# EAGLE board VoiceRecognition_Team3 (EAGLE 9.2.0)
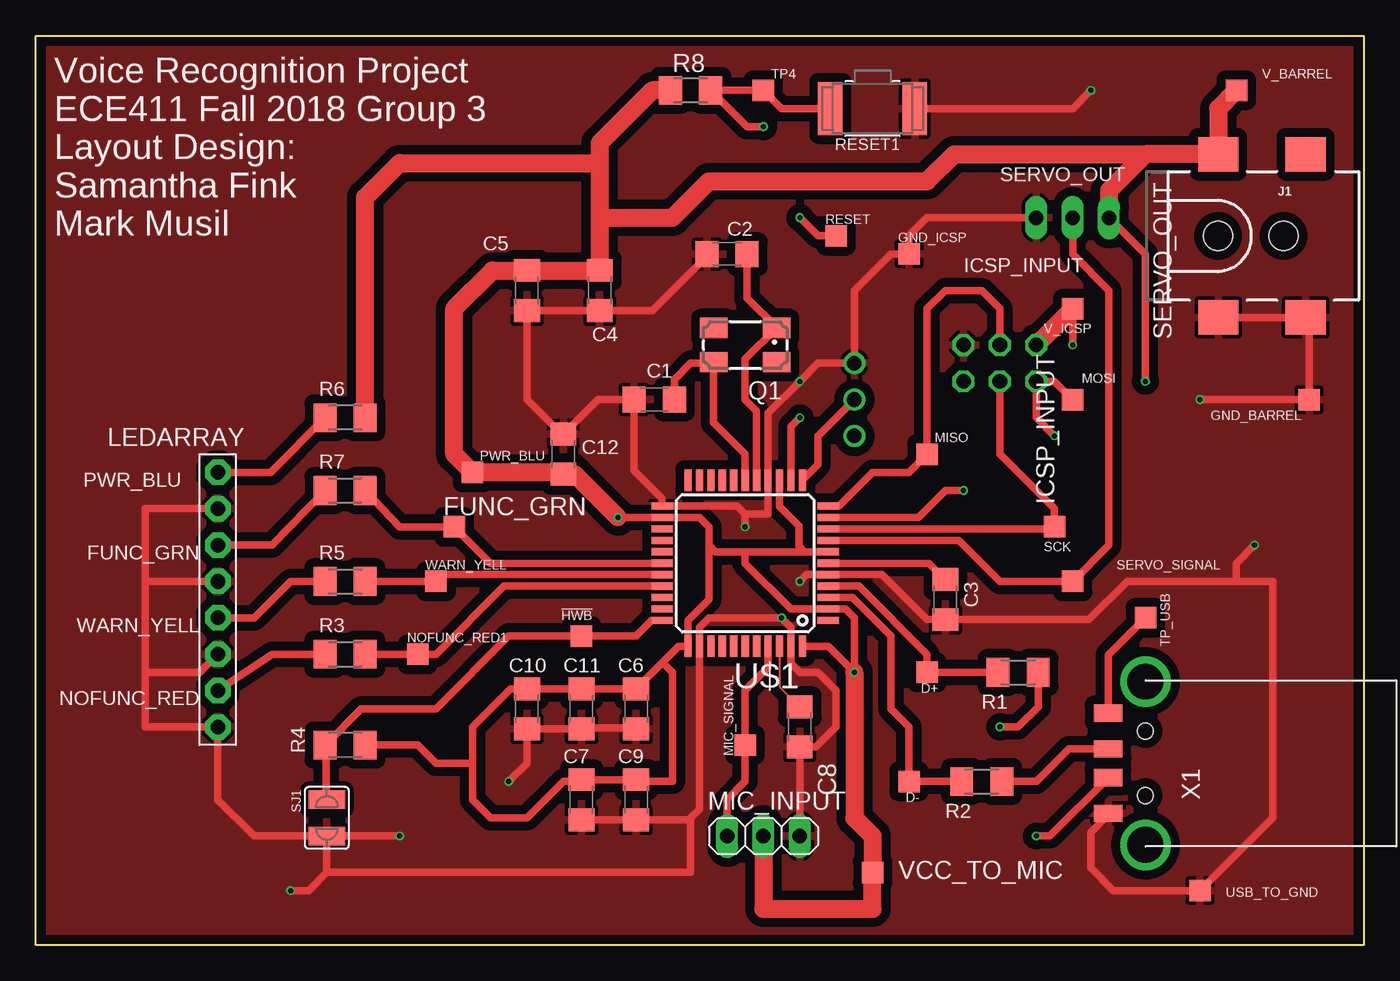
[diagram p0: board, top side]
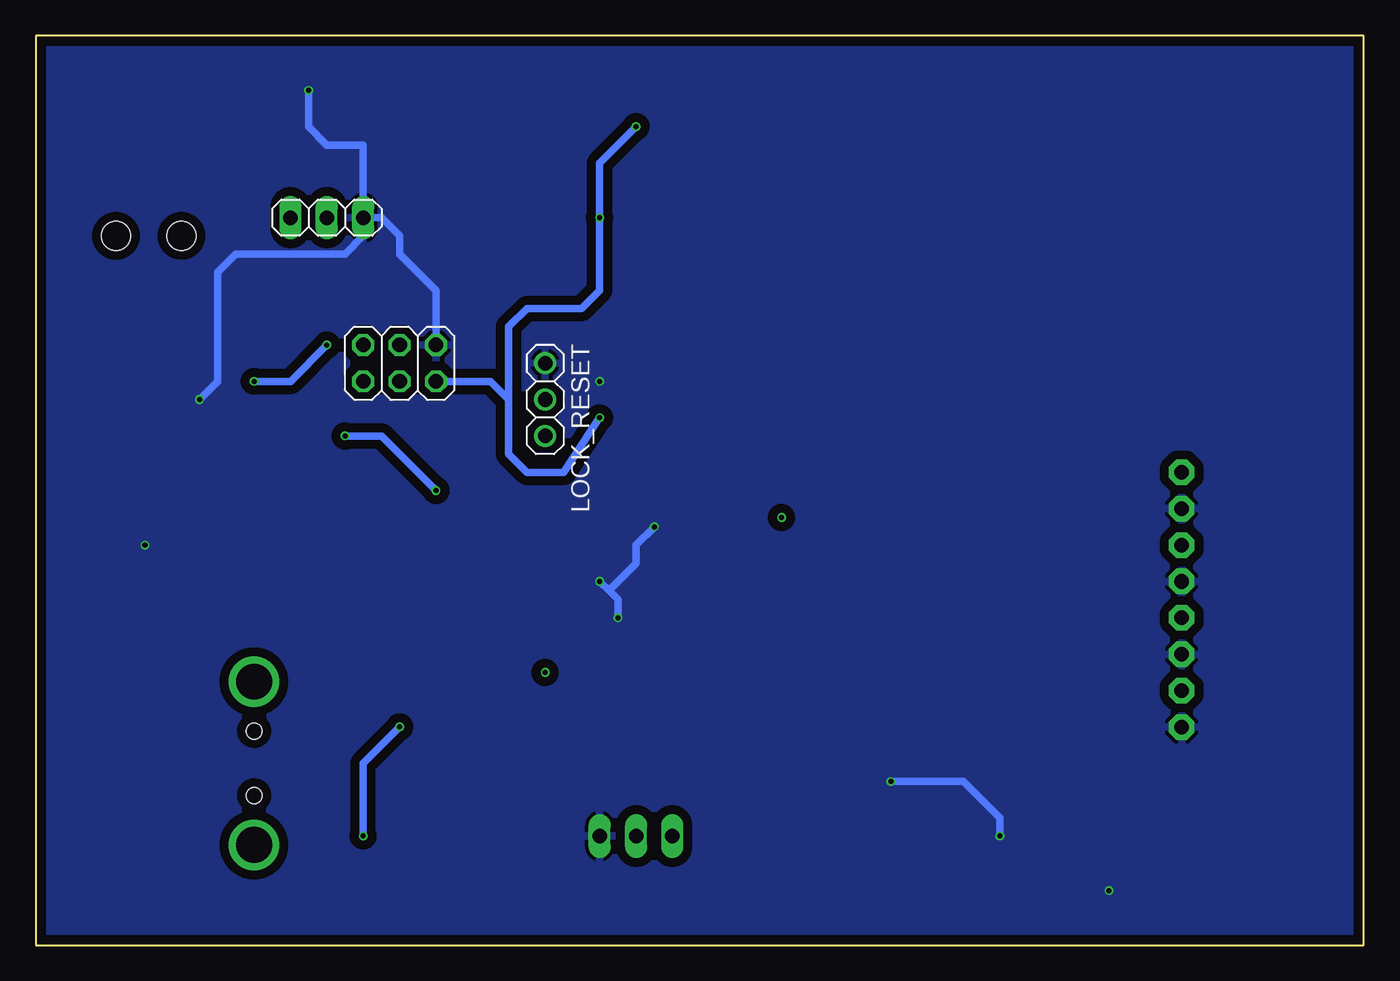
[diagram p1: board, bottom side, seen from below]

Size 92.71 x 63.5 mm. Coordinates in mm from the lower left corner, seen from the top.
Outline: 0,0 0,63.5 92.71,63.5 92.71,0 0,0
Copper layers (1*16): Top 0.035559375mm / dielectric 1.6mm / Bottom 0.035559375mm
Design rules "oshpark-2layer": minimum track width 6mil, minimum drill 10mil, track to track 6mil, track to pad 6mil, pad to pad 6mil, via to via 6mil, smd to smd 6mil, copper to edge 15mil, drill to drill 6mil, minimum pad ring 5mil, minimum via ring 5mil, stop-mask expansion 2.5mil, vias tented up to drill 0mil, thermal gap 10mil
Net classes: 0 VCC: width 0.05 mm; 1 GND: width 0.001 mm

## Footprints (pad centres in the part's own frame; a part is rotated, then mirrored left to right if it is on the bottom)
TP15SQ = smd 1.5 x 1.5: TP 0,0
C1206 = smd 1.6 x 1.8: 1 -1.4,0; 2 1.4,0
2X03 = drill 1.016 octagon: 1 -2.54,-1.27; 2 -2.54,1.27; 3 0,-1.27; 4 0,1.27; 5 2.54,-1.27; 6 2.54,1.27
POWER_JACK_SMD = smd 2.8 x 2.4: GND 0,-5.7; P$4 6.1,-5.7; VIN0 0,5.7; VIN1 6.1,5.7 | hole 2.032: 0,0; 4.572,0
1X08-BIG = drill 1.016 pad 1.778 octagon: 1 -8.89,0; 2 -6.35,0; 3 -3.81,0; 4 -1.27,0; 5 1.27,0; 6 3.81,0; 7 6.35,0; 8 8.89,0
1X03 = drill 1.016: 1 -2.54,0; 2 0,0; 3 2.54,0
1X03' = drill 1.016 long: 1 -2.54,0; 2 0,0; 3 2.54,0
CTS406 = smd 1.9 x 1.4: 1 -2.2,-1.2; 2 2.2,-1.2; 3 2.2,1.2; 4 -2.2,1.2
M1206 = smd 1.6 x 2: 1 -1.4,0; 2 1.4,0
BTN_CK_KSS = smd 1.7 x 3.7: P$1 -2.95,0; P$2 2.95,0
SJW = smd 1.27 x 2.54: 1 -1.27,0; 2 1.27,0
TQFP44 = smd 1.5 x 0.5: 1 -5.8,4; 2 -5.8,3.2; 3 -5.8,2.4; 4 -5.8,1.6; 5 -5.8,0.8; 6 -5.8,0; 7 -5.8,-0.8; 8 -5.8,-1.6; 9 -5.8,-2.4; 10 -5.8,-3.2; 11 -5.8,-4; 23 5.8,-4; 24 5.8,-3.2; 25 5.8,-2.4; 26 5.8,-1.6; 27 5.8,-0.8; 28 5.8,0; 29 5.8,0.8; 30 5.8,1.6; 31 5.8,2.4; 32 5.8,3.2; 33 5.8,4 | smd 0.5 x 1.5: 12 -4,-5.8; 13 -3.2,-5.8; 14 -2.4,-5.8; 15 -1.6,-5.8; 16 -0.8,-5.8; 17 0,-5.8; 18 0.8,-5.8; 19 1.6,-5.8; 20 2.4,-5.8; 21 3.2,-5.8; 22 4,-5.8; 34 4,5.8; 35 3.2,5.8; 36 2.4,5.8; 37 1.6,5.8; 38 0.8,5.8; 39 0,5.8; 40 -0.8,5.8; 41 -1.6,5.8; 42 -2.4,5.8; 43 -3.2,5.8; 44 -4,5.8
MOLEX_480371000 = smd 1.2 x 2: 1 3.5,2.6; 2 1,2.6; 3 -1,2.6; 4 -3.5,2.6 | drill 2.5: M1 -5.7,0; M2 5.7,0 | hole 1.1: -2.25,0; 2.25,0

## Placement (x,y rotation side)
!HWB  TPTP15SQ  [TP15SQ]  38.1,21.59 0 top
C1  18pF  [C1206]  43.18,38.1 0 top
C2  18pF  [C1206]  48.26,48.26 0 top
C3  1uF  [C1206]  63.5,24.13 270 top
C4  100nF  [C1206]  39.37,45.72 270 top
C5  10uF  [C1206]  34.29,45.72 270 top
C6  100nF  [C1206]  41.91,16.51 270 top
C7  100nF  [C1206]  38.1,10.16 270 top
C8  100nF  [C1206]  53.34,15.24 270 top
C9  100nF  [C1206]  41.91,10.16 270 top
C10  100nF  [C1206]  34.29,16.51 270 top
C11  100nF  [C1206]  38.1,16.51 270 top
C12  100nF  [C1206]  36.83,34.29 90 top
D+  TPTP15SQ  [TP15SQ]  62.23,19.05 0 top
D-  TPTP15SQ  [TP15SQ]  60.96,11.43 0 top
FUNC_GRN  TPTP15SQ  [TP15SQ]  29.21,29.21 0 top
GND_BARREL  TPTP15SQ  [TP15SQ]  88.9,38.1 180 top
GND_ICSP  TPTP15SQ  [TP15SQ]  60.96,48.26 0 top
ICSP_INPUT  [2X03]  67.31,40.64 0 bottom
J1  5.5x2.1mm Barrel  [POWER_JACK_SMD]  82.55,49.53 0 top
LEDARRAY  [1X08-BIG]  12.7,24.13 270 top
LOCK_RESET  [1X03]  57.15,38.1 270 bottom
MIC_INPUT  [1X03']  50.8,7.62 0 top
MIC_SIGNAL  TPTP15SQ  [TP15SQ]  49.53,13.97 0 top
MISO  TPTP15SQ  [TP15SQ]  62.23,34.29 0 top
MOSI  TPTP15SQ  [TP15SQ]  72.39,38.1 0 top
NOFUNC_RED1  TPTP15SQ  [TP15SQ]  26.67,20.32 0 top
PWR_BLU  TPTP15SQ  [TP15SQ]  30.48,33.02 180 top
Q1  16MHz  [CTS406]  49.53,41.91 180 top
R1  22  [M1206]  68.58,19.05 180 top
R2  22  [M1206]  66.04,11.43 180 top
R3  1k  [M1206]  21.59,20.32 180 top
R4  10k  [M1206]  21.59,13.97 0 top
R5  1k  [M1206]  21.59,25.4 180 top
R6  1k  [M1206]  21.59,36.83 0 top
R7  1k  [M1206]  21.59,31.75 180 top
R8  10k  [M1206]  45.72,59.69 180 top
RESET  TPTP15SQ  [TP15SQ]  55.88,49.53 0 top
RESET1  [BTN_CK_KSS]  58.42,58.42 180 top
SCK  TPTP15SQ  [TP15SQ]  71.12,29.21 0 top
SERVO_OUT  [1X03']  72.39,50.8 0 bottom
SERVO_SIGNAL  TPTP15SQ  [TP15SQ]  72.39,25.4 0 top
SJ1  [SJW]  20.32,8.89 90 top
TP4  TPTP15SQ  [TP15SQ]  50.8,59.69 270 top
TP_USB  TPTP15SQ  [TP15SQ]  77.47,22.86 0 top
U$1  ATMEGA32U4-AU  [TQFP44]  49.53,26.67 180 top
USB_TO_GND  TPTP15SQ  [TP15SQ]  81.28,3.81 0 top
V_BARREL  TPTP15SQ  [TP15SQ]  83.82,59.69 0 top
V_ICSP  TPTP15SQ  [TP15SQ]  72.39,44.45 0 top
VCC_TO_MIC  TPTP15SQ  [TP15SQ]  58.42,5.08 0 top
WARN_YELL  TPTP15SQ  [TP15SQ]  27.94,25.4 0 top
X1  USB-A  [MOLEX_480371000]  77.47,12.7 90 top

## Library data of the parts
!HWB D+ D- FUNC_GRN GND_BARREL GND_ICSP MIC_SIGNAL MISO MOSI NOFUNC_RED1 PWR_BLU RESET SCK SERVO_SIGNAL TP4 TP_USB USB_TO_GND V_BARREL V_ICSP VCC_TO_MIC WARN_YELL = testpad
C1-C12 = rcl; SPICEPREFIX: C
ICSP_INPUT MIC_INPUT SERVO_OUT = pinhead
J1 = SparkFun-Connectors; PROD_ID: CONN-08106; SF_ID: PRT-12748
LEDARRAY LOCK_RESET RESET1 U$1 X1 = adafruit
Q1 = adafruit; OC_FARNELL: unknown; OC_NEWARK: unknown
R1-R8 = rcl; SPICEPREFIX: R
SJ1 = jumper

## Nets
FUNC_GRN: FUNC_GRN.TP R7.1 U$1.28
GND: C1.1 C2.1 C3.2 C4.2 C5.2 C6.2 C7.2 C8.2 C9.2 C10.2 C11.2 C12.2 GND_BARREL.TP GND_ICSP.TP ICSP_INPUT.6 J1.GND J1.P$4 LEDARRAY.2 LEDARRAY.4 LEDARRAY.6 LEDARRAY.8 LOCK_RESET.1 MIC_INPUT.3 RESET1.P$1 SERVO_OUT.3 SJ1.1 U$1.5 U$1.15 U$1.23 U$1.35 U$1.43 USB_TO_GND.TP X1.4
HWB: !HWB.TP R4.1 SJ1.2 U$1.33
LOCK_RESET: LOCK_RESET.2 U$1.12
MIC_SIGNAL: MIC_INPUT.1 MIC_SIGNAL.TP U$1.41
MISO: ICSP_INPUT.4 MISO.TP U$1.11
MOSI: ICSP_INPUT.1 MOSI.TP U$1.10
N$1: C3.1 U$1.6
N$2: C1.2 Q1.3 U$1.17
N$3: R1.1 X1.3
N$4: LEDARRAY.1 R6.1
N$5: LEDARRAY.5 R5.2
N$6: LEDARRAY.7 R3.2
N$7: TP_USB.TP X1.1
N$8: LEDARRAY.3 R7.2
N$9: R2.1 X1.2
N$12: D+.TP R1.2 U$1.4
N$14: C8.1 U$1.42
N$20: D-.TP R2.2 U$1.3
N$22: C2.2 Q1.1 U$1.16
NOFUNC_RED: NOFUNC_RED1.TP R3.1 U$1.30
RST: ICSP_INPUT.5 R8.1 RESET1.P$2 RESET.TP TP4.TP U$1.13
SCK: ICSP_INPUT.3 SCK.TP U$1.9
SIGNAL: SERVO_OUT.2 SERVO_SIGNAL.TP U$1.8
VCC: C4.1 C5.1 C6.1 C7.1 C9.1 C10.1 C11.1 C12.1 ICSP_INPUT.2 J1.VIN0 MIC_INPUT.2 PWR_BLU.TP R4.2 R6.2 R8.2 SERVO_OUT.1 U$1.2 U$1.7 U$1.14 U$1.24 U$1.34 U$1.44 V_BARREL.TP V_ICSP.TP VCC_TO_MIC.TP
WARN_YELL: R5.1 U$1.29 WARN_YELL.TP

## Tracks (layer width: path | path; a pad name or v marks a point on that pad's centre or on a via)
FUNC_GRN
  Top 0.508: U$1.28 31.75,26.67 FUNC_GRN.TP 25.4,29.21 R7.1
GND  (via drill 0.35)
  Top 0.152: 55.88,25.87 U$1.5 | 74.93,9.14 X1.4
  Top 0.508: LEDARRAY.6 11.43,19.05 7.62,19.05 | 7.62,19.05 7.62,15.24 LEDARRAY.8 12.7,10.16 15.24,7.62 SJ1.1 | LEDARRAY.4 7.62,25.4 | 7.62,25.4 7.62,19.05 | 7.62,25.4 7.62,30.48 LEDARRAY.2 | v53.34,25.4 53.81,25.87 U$1.5 | 83.82,25.4 76.2,25.4 73.53,22.73 C3.2 62.23,22.73 59.09,25.87 55.88,25.87 | 83.82,25.4 86.36,25.4 86.36,8.89 USB_TO_GND.TP 75.24,3.81 73.66,5.39 73.66,7.87 74.93,9.14 | C6.2 41.97,15.18 38.17,15.18 C11.2 C10.2 34.29,12.7 v33.02,11.43 | 20.32,5.08 45.72,5.08 45.72,8.89 | 45.72,8.89 45.59,8.76 C9.2 C7.2 | C2.1 46.86,48.13 43.05,44.32 C4.2 C5.2 34.29,38.1 36.7,35.69 C12.2 39.24,38.1 C1.1 41.78,33.15 43.73,31.2 U$1.23 48.95,30.67 49.53,30.09 | 45.72,8.89 46.33,9.5 U$1.35 46.33,22.2 46.99,22.86 v52.07,22.86 52.73,22.2 U$1.43 52.73,19.66 53.34,19.05 54.61,19.05 55.88,17.78 55.88,15.24 54.48,13.84 C8.2 MIC_INPUT.3 | v25.4,7.62 SJ1.1 | SJ1.1 20.32,5.08 | v17.78,3.81 19.05,3.81 20.32,5.08 | J1.GND J1.P$4 88.9,43.58 GND_BARREL.TP v81.28,38.1 | v73.66,59.69 72.39,58.42 RESET1.P$1 | SERVO_OUT.3 62.23,50.8 60.96,49.53 GND_ICSP.TP 59.69,48.26 57.15,45.72 LOCK_RESET.1 54.61,40.64 v53.34,39.37 51.13,37.16 U$1.15 51.13,30.09 49.53,30.09 | v49.53,29.21 49.53,30.09 | v85.09,27.94 83.82,26.67 83.82,25.4
  Bottom 0.508: v52.07,22.86 52.07,24.13 52.7,24.77 | 52.7,24.77 v53.34,25.4 | ICSP_INPUT.6 64.77,45.72 67.31,48.26 67.31,49.53 68.58,50.8 SERVO_OUT.3 | v25.4,7.62 25.4,8.89 27.94,11.43 v33.02,11.43 | SERVO_OUT.3 69.85,49.53 71.12,48.26 78.74,48.26 80.01,46.99 80.01,39.37 v81.28,38.1 | SERVO_OUT.3 69.85,55.88 72.39,55.88 73.66,57.15 v73.66,59.69 | 52.7,24.77 50.8,26.67 50.8,27.94 v49.53,29.21
  pour Top (isolate 0.635): 0,63.5 0,0 92.71,0 92.71,63.5
  pour Bottom (isolate 0.635): 0,63.5 0,0 92.71,0 92.71,63.5
HWB
  Top 0.508: U$1.33 42.99,22.67 41.91,21.59 !HWB.TP 33.02,21.59 27.94,16.51 22.73,16.51 20.25,14.04 | 20.25,14.04 R4.1 | SJ1.2 20.25,10.22 20.25,14.04
LOCK_RESET
  Top 0.508: U$1.12 54.61,33.55 54.61,35.56 LOCK_RESET.2
MIC_SIGNAL
  Top 0.508: U$1.41 51.13,19.38 49.53,17.78 MIC_SIGNAL.TP 49.53,11.43 48.26,10.16 MIC_INPUT.1
MISO
  Top 0.508: ICSP_INPUT.4 67.31,44.45 66.04,45.72 63.5,45.72 62.23,44.45 MISO.TP 60.96,33.02 58.42,33.02 56.07,30.67 U$1.11
MOSI  (via drill 0.35)
  Top 0.508: MOSI.TP 71.12,39.37 ICSP_INPUT.1 69.85,36.83 v71.12,35.56 | U$1.10 61.62,29.87 63.5,31.75 v64.77,31.75
  Bottom 0.508: v64.77,31.75 68.58,35.56 v71.12,35.56
N$1
  Top 0.508: C3.1 62.36,26.67 U$1.6
N$2
  Top 0.152: 47.33,40.64 Q1.3 | 49.53,33.02 U$1.17
  Top 0.508: C1.2 44.58,39.5 45.72,40.64 47.33,40.64 | Q1.3 47.33,36.49 49.53,34.29 49.53,33.02
N$3  (via drill 0.35)
  Top 0.508: X1.3 70.79,7.62 v69.85,7.62 | v67.31,15.24 68.58,15.24 69.98,16.64 R1.1
  Bottom 0.508: v69.85,7.62 69.85,12.7 v67.31,15.24
N$4
  Top 0.508: R6.1 16.38,33.02 LEDARRAY.1
N$5
  Top 0.508: R5.2 17.78,25.4 15.24,22.86 LEDARRAY.5
N$6
  Top 0.508: R3.2 16.51,20.32 LEDARRAY.7
N$7
  Top 0.508: TP_USB.TP 74.87,20.26 X1.1
N$8
  Top 0.508: R7.2 16.51,27.94 LEDARRAY.3
N$9
  Top 0.508: X1.2 72.12,13.7 69.85,11.43 R2.1
N$12
  Top 0.508: R1.2 D+.TP 62.23,20.32 57.48,25.07 U$1.4
N$14
  Top 0.152: U$1.42 51.93,18.05 C8.1
N$20
  Top 0.508: U$1.3 57.01,24.27 59.69,21.59 59.69,16.51 60.96,15.24 D-.TP R2.2
N$22
  Top 0.508: C2.2 49.66,45.18 Q1.1 49.53,40.91 49.53,38.1 50.33,37.3 U$1.16
NOFUNC_RED
  Top 0.508: U$1.30 32.69,25.07 27.94,20.32 NOFUNC_RED1.TP R3.1
RST  (via drill 0.35)
  Top 0.508: RESET1.P$2 52.07,58.42 TP4.TP R8.1 49.66,57.15 v50.8,57.15 | RESET.TP 54.61,49.53 v53.34,50.8 | v53.34,36.83 52.73,36.22 U$1.13
  Bottom 0.508: 59.69,38.1 59.69,43.18 58.42,44.45 54.61,44.45 53.34,45.72 v53.34,50.8 53.34,54.61 v50.8,57.15 | 59.69,38.1 60.96,39.37 ICSP_INPUT.5 | 59.69,38.1 59.69,34.29 58.42,33.02 55.88,33.02 v53.34,36.83
SCK
  Top 0.508: ICSP_INPUT.3 67.31,34.29 71.12,30.48 SCK.TP 70.98,29.07 U$1.9
SIGNAL
  Top 0.508: U$1.8 64.44,28.27 67.31,25.4 SERVO_SIGNAL.TP 74.93,27.94 74.93,45.72 72.39,48.26 SERVO_OUT.2
VCC  (via drill 0.35)
  Top 0.152: 55.88,23.47 U$1.2
  Top 0.508: v40.64,29.87 U$1.24 46.33,29.87 46.99,29.21 46.99,27.94 | U$1.2 52.73,23.47 49.53,26.67 49.53,27.47 | 55.88,23.47 56.54,23.47 57.15,22.86 v57.15,19.05 55.33,20.87 U$1.44 | 55.88,23.47 | 43.75,19.75 44.87,20.87 U$1.34 45.53,22.67 46.99,24.13 46.99,27.94 | 43.75,19.75 C6.1 C11.1 C10.1 33.15,17.91 30.48,15.24 30.48,12.7 | U$1.7 53.67,27.47 | 53.67,27.47 53.27,27.87 53.27,29.28 51.93,30.62 U$1.14 | SERVO_OUT.1 77.47,48.26 v77.47,39.37 | 43.75,19.75 44.45,19.05 44.45,11.43 42.04,11.43 C9.1 C7.1 37.97,11.43 36.83,11.43 34.29,8.89 31.75,8.89 30.48,10.16 30.48,12.7 | R4.2 26.67,13.97 27.94,12.7 30.48,12.7 | 46.99,27.94 47.46,27.47 49.53,27.47 | 49.53,27.47 53.67,27.47 | V_ICSP.TP v72.39,41.91
  Top 1.27: R8.2 43.05,59.69 39.37,56.01 39.37,54.61 | 39.37,54.61 39.37,50.8 | V_ICSP.TP ICSP_INPUT.2 | MIC_INPUT.2 50.8,2.54 58.42,2.54 VCC_TO_MIC.TP 58.42,7.62 57.15,8.89 v57.15,19.05 | 77.47,55.23 J1.VIN0 82.55,58.42 V_BARREL.TP | 77.47,55.23 74.93,52.69 SERVO_OUT.1 | v40.64,29.87 37.62,32.89 C12.1 36.83,33.02 PWR_BLU.TP 29.21,34.29 29.21,44.45 31.88,47.12 C5.1 C4.1 39.37,50.8 | 39.37,50.8 44.45,50.8 46.99,53.34 62.23,53.34 64.12,55.23 77.47,55.23 | 39.37,54.61 25.4,54.61 22.99,52.2 R6.2
  Bottom 0.508: v72.39,41.91 74.93,39.37 v77.47,39.37
WARN_YELL
  Top 0.508: U$1.29 28.41,25.87 WARN_YELL.TP R5.1

## Text on the board
tPlace: SERVO_OUT | Voice Recognition Project / ECE411 Fall 2018 Group 3 / Layout Design: / Samantha Fink / Mark Musil | ICSP_INPUT | PWR_BLU | FUNC_GRN | WARN_YELL | NOFUNC_RED